# EAGLE board MainECU rev1b (EAGLE 9.2.2), part 1 of 2
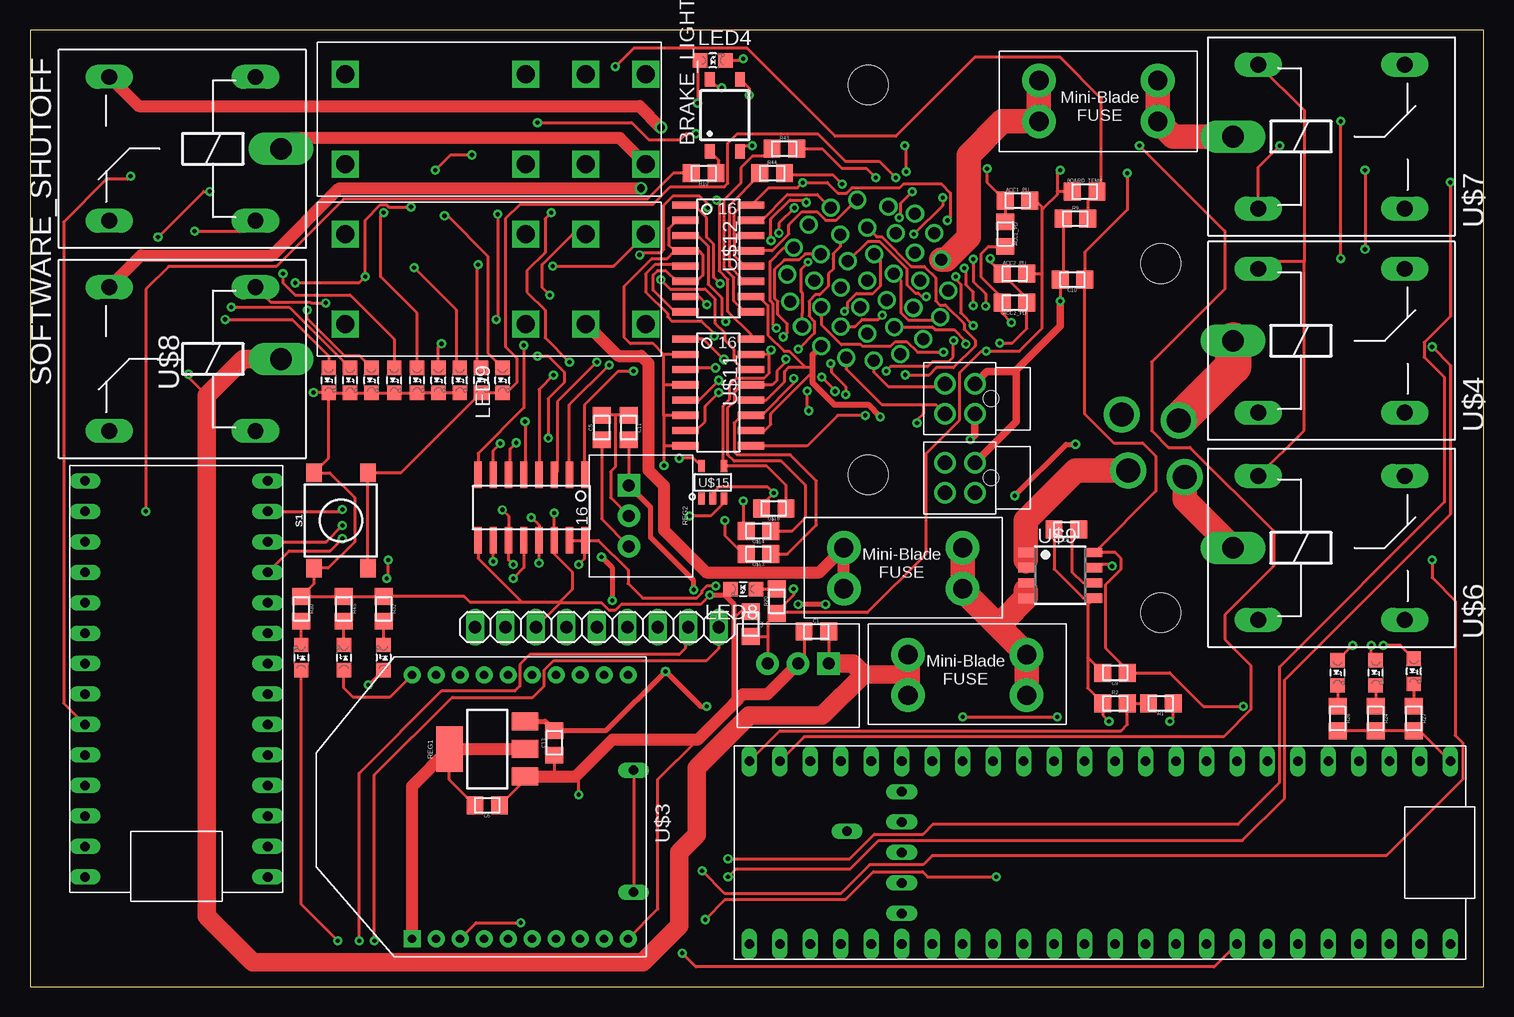
[diagram p0: board, top side]
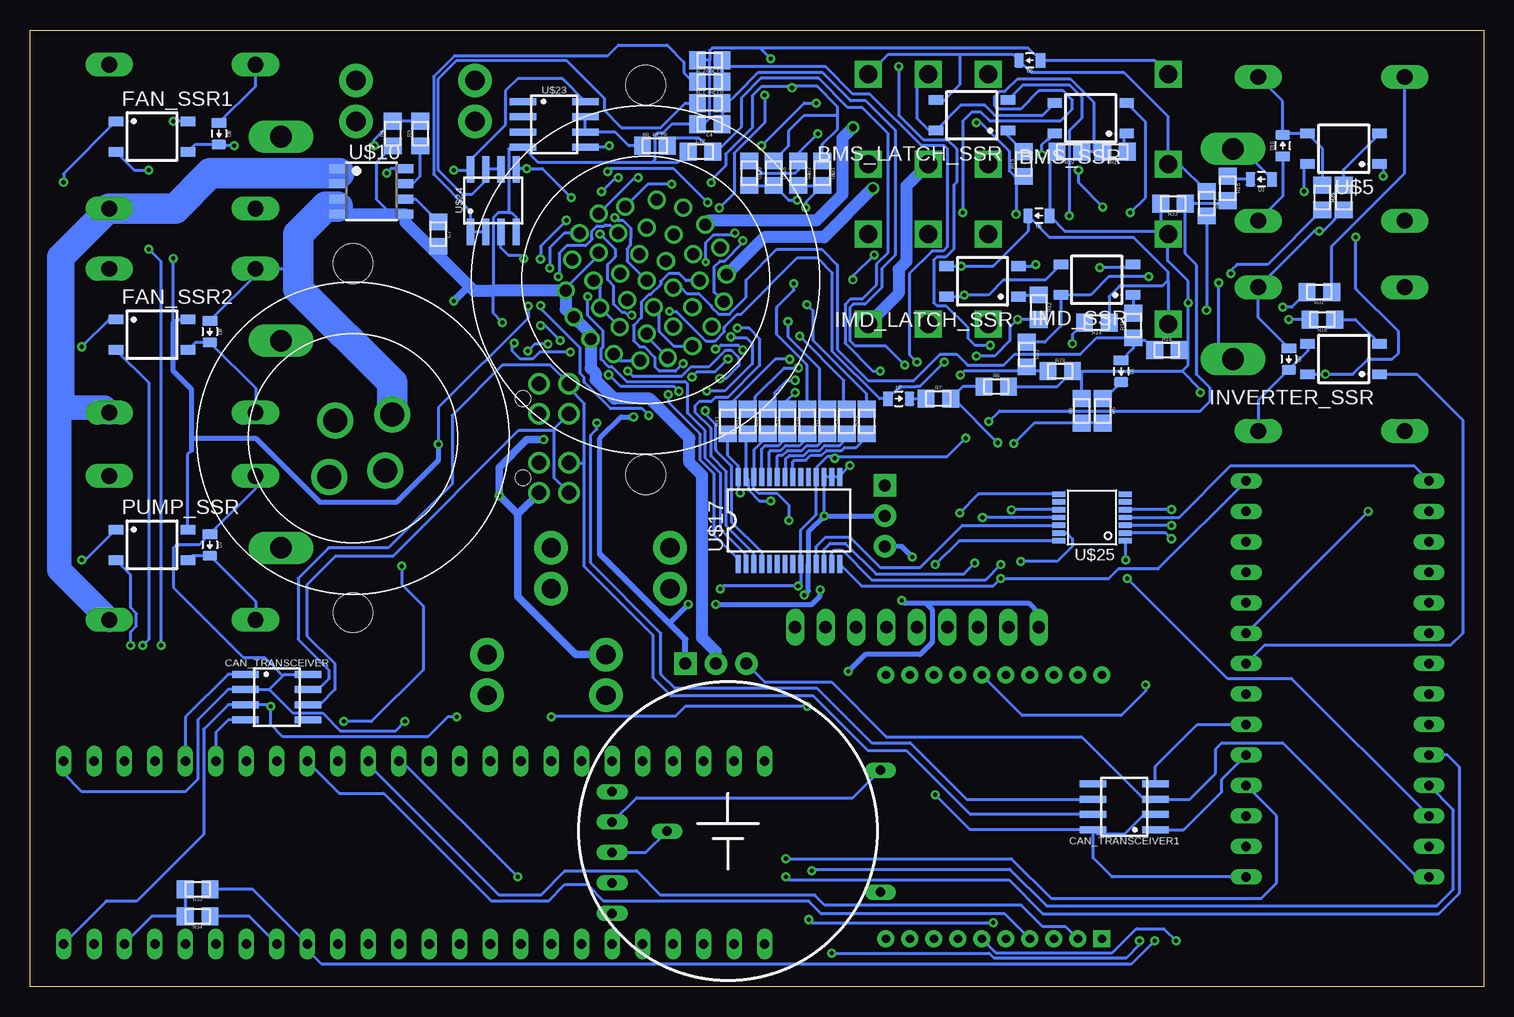
[diagram p1: board, bottom side, seen from below]

Size 121.16 x 79.76 mm. Coordinates in mm from the lower left corner, seen from the top.
Outline: 0,0 121.16,0 121.16,79.76 0,79.76 0,0
Copper layers (1*16): Top 0.035mm / dielectric 1.5mm / Bottom 0.035mm
Design rules "DRC Advanced Circuits": minimum track width 6mil, minimum drill 10mil, track to track 6mil, track to pad 6mil, pad to pad 6mil, via to via 6mil, smd to smd 6mil, copper to edge 40mil, drill to drill 6mil, minimum pad ring 10mil, minimum via ring 8mil, stop-mask expansion 4mil, vias tented up to drill 0mil, thermal gap 10mil

## Footprints (pad centres in the part's own frame; a part is rotated, then mirrored left to right if it is on the bottom)
MINI-BLADE_FUSE_HOLDER = drill 1.613 pad 2.794: L1 0,3.404; L2 0,0; R1 9.906,3.404; R2 9.906,0
0805 = smd 1.4 x 1.5: 1 -1.025,0; 2 1.025,0
1X09 = drill 1.016 long: 1 -8.89,0; 2 -6.35,0; 3 -3.81,0; 4 -1.27,0; 5 1.27,0; 6 3.81,0; 7 6.35,0; 8 8.89,0; 9 11.43,0
SOP04 = smd 0.8 x 1.2: 1 -1.27,-3; 2 1.27,-3; 3 1.27,3; 4 -1.27,3
SOIC-08 = smd 0.6 x 2.2: 1 -1.905,-2.6; 2 -0.635,-2.6; 3 0.635,-2.6; 4 1.905,-2.6; 5 1.905,2.6; 6 0.635,2.6; 7 -0.635,2.6; 8 -1.905,2.6
0805_D = smd 0.8 x 1.2: A -0.9,0; C 0.9,0
G2RL-2 = drill 1.5 square: 2 10.008,0; 3 5.004,0; 4 0,0; 5 0,7.493; 6 5.004,7.493; 7 10.008,7.493; COIL+ 25.019,0; COIL- 25.019,7.493
LED-805 = smd 1.2 x 1.2: A 0,-1.05; C 0,1.05
OKI-78SR = drill 1 pad 1.88 square: 1 -2.54,0 | drill 1 pad 1.88: 2 0,0; 3 2.54,0
SOT223 = smd 1.5 x 2.235: 1 -2.3,-3.15; 2 0,-3.15; 3 2.3,-3.15 | smd 3.8 x 2.2: 4 0,3.15
TACTILE_SWITCH_SMD_6.2MM_TALL = smd 1.55 x 1.3: A1 -3.975,-2.25; A2 3.975,-2.25; B1 -3.975,2.25; B2 3.975,2.25
ZF112 = drill 1.321 long: 1 4.064,14.884; 2 4.064,2.896; O 16.256,14.884; S 16.256,2.896 | drill 1.803 long: P 1.956,8.89
TEENSY_3.2_SIMPLE = drill 0.8 long: 3.3V 16.51,29.21; A0 16.51,3.81; A1 16.51,6.35; A2 16.51,8.89; A3 16.51,11.43; A4 16.51,13.97; A5 16.51,16.51; A6 16.51,19.05; A7 16.51,21.59; A8 16.51,24.13; A9 16.51,26.67; AGND 16.51,31.75; D0(RX1) 1.27,31.75; D1(TX1) 1.27,29.21; D2 1.27,26.67; D3(CANTX) 1.27,24.13; D4(CANRX) 1.27,21.59; D5 1.27,19.05; D6 1.27,16.51; D7(RX3) 1.27,13.97; D8(TX3) 1.27,11.43; D9(RX2) 1.27,8.89; D10(TX2) 1.27,6.35; D11 1.27,3.81; D12 1.27,1.27; D13 16.51,1.27; GND 1.27,34.29; VIN 16.51,34.29
TEENSY_3.5_EXT = drill 0.8 long: 3.3V 16.51,54.61; 3.3V_1 1.27,24.13; 3.3V_2 6.35,13.97; A0 16.51,29.21; A1 16.51,31.75; A2 16.51,34.29; A3 16.51,36.83; A4 16.51,39.37; A5 16.51,41.91; A6 16.51,44.45; A7 16.51,46.99; A8 16.51,49.53; A9 16.51,52.07; A12 1.27,3.81; A13 1.27,1.27; A14 16.51,1.27; A15 16.51,3.81; A16 16.51,6.35; A17 16.51,8.89; A18 16.51,11.43; A19 16.51,13.97; A20 16.51,16.51; A21 16.51,19.05; A22 16.51,21.59; AGND 16.51,57.15; D0(RX1) 1.27,57.15; D1(TX1) 1.27,54.61; D2 1.27,52.07; D3(CANTX) 1.27,49.53; D4(CANRX) 1.27,46.99; D5 1.27,44.45; D6 1.27,41.91; D7(RX3) 1.27,39.37; D8(TX3) 1.27,36.83; D9(RX2) 1.27,34.29; D10(TX2) 1.27,31.75; D11 1.27,29.21; D12 1.27,26.67; D13 16.51,26.67; D24 1.27,21.59; D25 1.27,19.05; D26 1.27,16.51; D27 1.27,13.97; D28 1.27,11.43; D29 1.27,8.89; D30 1.27,6.35; GND 1.27,59.69; GND_1 16.51,24.13; GND_2 8.89,13.97; PROG 11.43,13.97; RST 13.97,13.97; VBAT 3.81,13.97; VIN 16.51,59.69
XBEE = drill 0.7 pad 1.422 square: 1 -11,5.5 | drill 0.7 pad 1.422: 2 -11,3.5; 3 -11,1.5; 4 -11,-0.5; 5 -11,-2.5; 6 -11,-4.5; 7 -11,-6.5; 8 -11,-8.5; 9 -11,-10.5; 10 -11,-12.5; 11 11,-12.5; 12 11,-10.5; 13 11,-8.5; 14 11,-6.5; 15 11,-4.5; 16 11,-2.5; 17 11,-0.5; 18 11,1.5; 19 11,3.5; 20 11,5.5
SOP8 = smd 0.76 x 1.27: 1 -1.905,-2.86; 2 -0.635,-2.86; 3 0.635,-2.86; 4 1.905,-2.86; 5 1.905,2.86; 6 0.635,2.86; 7 -0.635,2.86; 8 -1.905,2.86
SOIC-16 = smd 0.6 x 2.2: 1 -4.445,-2.794; 2 -3.175,-2.794; 3 -1.905,-2.794; 4 -0.635,-2.794; 5 0.635,-2.794; 6 1.905,-2.794; 7 3.175,-2.794; 8 4.445,-2.794; 9 4.445,2.667; 10 3.175,2.667; 11 1.905,2.667; 12 0.635,2.667; 13 -0.635,2.667; 14 -1.905,2.667; 15 -3.175,2.667; 16 -4.445,2.667
SOT-23-5 = smd 1 x 0.55: 1 -1.35,0.95; 2 -1.35,0; 3 -1.35,-0.95; 4 1.35,-0.95; 5 1.35,0.95
SSOP28 = smd 0.4 x 1.5: 1 -4.225,-3.625; 2 -3.575,-3.625; 3 -2.925,-3.625; 4 -2.275,-3.625; 5 -1.625,-3.625; 6 -0.975,-3.625; 7 -0.325,-3.625; 8 0.325,-3.625; 9 0.975,-3.625; 10 1.625,-3.625; 11 2.275,-3.625; 12 2.925,-3.625; 13 3.575,-3.625; 14 4.225,-3.625; 15 4.225,3.625; 16 3.575,3.625; 17 2.925,3.625; 18 2.275,3.625; 19 1.625,3.625; 20 0.975,3.625; 21 0.325,3.625; 22 -0.325,3.625; 23 -0.975,3.625; 24 -1.625,3.625; 25 -2.275,3.625; 26 -2.925,3.625; 27 -3.575,3.625; 28 -4.225,3.625
TSSOP-14 = smd 0.45 x 1.1: 1 -1.958,-2.618; 2 -1.308,-2.618; 3 -0.657,-2.618; 4 -0.007,-2.618; 5 0.642,-2.618; 6 1.292,-2.618; 7 1.942,-2.618; 8 1.942,2.918; 9 1.292,2.918; 10 0.642,2.918; 11 -0.007,2.918; 12 -0.657,2.918; 13 -1.308,2.918; 14 -1.958,2.918
CR-2450/G1AN = drill 0.8 long: +_0 -5.08,12.7; +_1 5.08,12.7; - 0,-5.08
AUTOSPORT_14-35 = drill 1: P$1 1.143,6.655; P$2 3.124,5.512; P$3 5.359,4.064; P$4 6.452,2.032; P$5 6.756,-0.254; P$6 6.274,-2.489; P$7 5.08,-4.445; P$8 3.302,-5.893; P$9 1.143,-6.655; P$10 -1.143,-6.655; P$11 -3.302,-5.893; P$12 -5.08,-4.445; P$13 -6.274,-2.489; P$14 -6.756,-0.254; P$15 -6.452,2.032; P$16 -5.359,4.064; P$17 -3.124,5.512; P$18 -1.143,6.655; P$19 1.143,4.369; P$20 3.124,3.023; P$21 4.318,1.016; P$22 4.318,-1.27; P$23 3.124,-3.226; P$24 1.143,-4.369; P$25 -1.143,-4.369; P$26 -3.124,-3.226; P$27 -4.318,-1.27; P$28 -4.318,1.016; P$29 -3.124,3.023; P$30 -1.143,4.369; P$31 1.143,1.88; P$32 2.286,-0.102; P$33 1.143,-2.083; P$34 -1.143,-2.083; P$35 -2.286,-0.102; P$36 -1.143,1.88; P$37 0,-0.102 | hole 3.3: -11.491,-11.491; 11.491,11.491
AUTOSPORT_12-04 = drill 2: P$1 0,3.81; P$2 3.708,0.889; P$3 0,-2.108; P$4 -3.708,0.889 | hole 3.3: -10.288,-10.288; 10.288,10.288
NANO-FIT_VERTICAL-4 = drill 1.2: P$1 -1.25,0; P$2 1.25,0; P$3 -1.25,2.5; P$4 1.25,2.5 | hole 1.3: 0,-1.34

## Placement (x,y rotation side)
5ABOARDFUSE  [MINI-BLADE_FUSE_HOLDER]  83.06,27.69 180 top
5AFUSE  [MINI-BLADE_FUSE_HOLDER]  84.07,72.14 0 top
5ASHUTDOWNFUSE  [MINI-BLADE_FUSE_HOLDER]  77.72,36.58 180 top
AC1_FILTR  510  [0805]  64.52,73.66 0 bottom
AC2_FILTR  510  [0805]  64.52,75.44 0 bottom
ACC1_PD  10k  [0805]  81.28,62.74 270 top
ACC1_PU  10k  [0805]  82.3,65.53 0 top
ACC2_PD  10k  [0805]  82.04,57.02 180 top
ACC2_PU  10k  [0805]  82.04,59.44 0 top
ADXL345_BREAKOUT  [1X09]  45.97,29.97 0 top
BMS_LATCH_SSR  CPC1002N  [SOP04]  42.67,72.64 90 bottom
BMS_SSR  CPC1002N  [SOP04]  32.77,72.39 90 bottom
BOARD_TEMP  THERMISTOR_NCP210805  [0805]  87.88,66.29 0 top
BR_FILTR  100  [0805]  69.09,70.1 0 bottom
BRAKE_LIGHT_SSR  CPC1002N  [SOP04]  57.91,72.64 0 top
C1  .22uF  [0805]  65.53,29.59 0 top
C2  .1uF  [0805]  60.07,30.23 270 top
C3  22µ  [0805]  64.52,77.22 180 bottom
C4  22µ  [0805]  64.52,71.88 180 bottom
C5  1uF  [0805]  47.62,46.61 90 top
C6  1uF  [0805]  38.1,15.11 180 top
C7  [0805]  87.12,62.74 270 bottom
C8  [0805]  86.36,38.1 180 top
C9  [0805]  90.42,26.16 180 top
C10  [0805]  86.87,58.93 180 top
C11  .22uF  [0805]  49.91,46.61 270 top
C12  2.2µ  [0805]  65.28,69.6 0 bottom
C13  .1uF  [0805]  43.69,20.32 90 top
CAN_TRANSCEIVER  MCP2551  [SOIC-08]  100.58,24.13 270 bottom
CAN_TRANSCEIVER1  MCP2551  [SOIC-08]  29.97,14.99 90 bottom
D1  DIODE0805  [0805_D]  30.23,51.31 270 bottom
D2  DIODE0805  [0805_D]  48.77,49.02 0 bottom
D3  DIODE0805  [0805_D]  18.54,67.31 180 bottom
D4  DIODE0805  [0805_D]  16.26,52.32 270 bottom
D5  DIODE0805  [0805_D]  37.85,77.22 180 bottom
D6  DIODE0805  [0805_D]  37.08,64.26 180 bottom
D7  DIODE0805  [0805_D]  106.17,36.83 270 bottom
D8  DIODE0805  [0805_D]  105.41,71.12 270 bottom
D9  DIODE0805  [0805_D]  106.17,54.61 270 bottom
D10  DIODE0805  [0805_D]  16.76,70.1 90 bottom
FAN_SSR1  CPC1002N  [SOP04]  111,70.87 270 bottom
FAN_SSR2  CPC1002N  [SOP04]  111,54.36 270 bottom
IMD_LATCH_SSR  CPC1002N  [SOP04]  41.78,58.8 90 bottom
IMD_SHUTDOWN  G2RL-2-DC12  [G2RL-2]  51.31,62.74 180 top
IMD_SHUTDOWN1  G2RL-2-DC12  [G2RL-2]  51.31,76.07 180 top
IMD_SSR  CPC1002N  [SOP04]  32.26,58.93 90 bottom
INVERTER_SSR  CPC1002N  [SOP04]  11.68,52.32 90 bottom
LED1  White  [LED-805]  37.59,50.55 180 top
LED2  White  [LED-805]  39.37,50.55 180 top
LED3  Green  [LED-805]  32.26,50.55 180 top
LED4  Red  [LED-805]  56.9,77.22 270 top
LED5  Yellow  [LED-805]  34.04,50.55 180 top
LED6  Red  [LED-805]  24.89,50.55 180 top
LED7  Green  [LED-805]  28.45,50.55 180 top
LED8  Purple  [LED-805]  59.44,33.15 90 top
LED9  Yellow  [LED-805]  35.81,50.55 180 top
LED10  Red  [LED-805]  29.46,27.43 0 top
LED11  Green  [LED-805]  22.61,27.43 0 top
LED12  Red  [LED-805]  115.32,26.29 180 top
LED13  Red  [LED-805]  108.97,26.16 180 top
LED14  Blue  [LED-805]  26.16,27.43 0 top
LED16  Red  [LED-805]  112.14,26.16 180 top
LED17  RED  [LED-805]  30.35,50.55 180 top
LED18  RED  [LED-805]  26.67,50.55 180 top
PUMP_SSR  CPC1002N  [SOP04]  111,36.83 270 bottom
R1  1K  [0805]  94.23,23.62 180 top
R2  2K  [0805]  90.42,23.62 0 top
R3  1K  [0805]  88.65,71.12 90 bottom
R4  2K  [0805]  90.93,71.12 90 bottom
R5  43k  [0805]  31.75,48.01 270 bottom
R6  12k  [0805]  33.53,48.01 90 bottom
R7  43k  [0805]  45.47,49.02 0 bottom
R8  12k  [0805]  40.64,50.04 0 bottom
R9  10k  [0805]  87.12,64.01 0 top
R10  43  [0805]  56.13,67.82 180 top
R11  43  [0805]  30.73,69.6 180 bottom
R12  33  [0805]  37.08,56.64 270 bottom
R13  33  [0805]  38.35,68.58 90 bottom
R14  820  [0805]  32.26,55.37 180 bottom
R15  43k  [0805]  21.34,66.55 270 bottom
R16  43  [0805]  13.46,55.63 180 bottom
R17  820  [0805]  23.11,65.28 270 bottom
R18  2.2k  [0805]  26.42,53.09 0 bottom
R19  10k  [0805]  34.54,69.6 180 bottom
R20  270  [0805]  62.23,32.13 90 top
R21  820  [0805]  29.21,55.12 90 bottom
R22  12k  [0805]  25.91,65.28 180 bottom
R23  43k  [0805]  38.1,52.7 270 bottom
R24  33  [0805]  112.14,22.35 270 top
R25  330  [0805]  11.68,65.79 90 bottom
R26  1.2K  [0805]  13.46,65.79 270 bottom
R27  33  [0805]  115.32,22.35 270 top
R28  33  [0805]  108.97,22.35 270 top
R29  12k  [0805]  35.31,51.31 0 bottom
R30  33  [0805]  22.61,31.5 270 top
R31  1.2K  [0805]  13.72,57.91 180 bottom
R32  100  [0805]  29.46,31.5 270 top
R33  4.7k  [0805]  107.19,8.13 180 bottom
R34  4.7k  [0805]  107.19,5.84 180 bottom
R35  270  [0805]  51.44,47.12 90 bottom
R36  270  [0805]  53.09,47.12 90 bottom
R37  270  [0805]  54.74,47.12 90 bottom
R38  270  [0805]  56.39,47.12 90 bottom
R39  270  [0805]  58.04,47.12 90 bottom
R40  270  [0805]  59.69,47.12 90 bottom
R41  270  [0805]  61.34,47.12 90 bottom
R42  270  [0805]  62.99,47.12 90 bottom
R43  0  [0805]  62.87,69.85 0 top
R44  0  [0805]  61.85,67.82 0 top
R45  2.3k  [0805]  26.16,31.5 270 top
REG  5V  [OKI-78SR]  64.01,26.92 180 top
REG1  TLV1117LV33  [SOT223]  38.1,19.81 90 top
REG2  5V  [OKI-78SR]  49.91,39.24 270 top
S1  [TACTILE_SWITCH_SMD_6.2MM_TALL]  25.91,38.86 90 top
SOFTWARE_SHUTOFF  G5LE  [ZF112]  22.86,78.74 180 top
U$1  TEENSY_3.2_SIMPLE  [TEENSY_3.2_SIMPLE]  21.08,43.43 180 top
U$2  TEENSY_3.5_EXT  [TEENSY_3.5_EXT]  58.67,20.07 270 top
U$3  XBEE  [XBEE]  37.34,14.99 90 top
U$4  G5LE  [ZF112]  98.3,44.96 0 top
U$5  CPC1002N  [SOP04]  11.68,69.85 90 bottom
U$6  G5LE  [ZF112]  98.3,27.69 0 top
U$7  G5LE  [ZF112]  98.3,61.98 0 top
U$8  G5LE  [ZF112]  22.86,61.21 180 top
U$9  ACS715_CURRENT_SENSOR  [SOP8]  85.85,34.29 270 top
U$10  ACS715_CURRENT_SENSOR  [SOP8]  92.71,66.29 270 bottom
U$11  TLP291-4  [SOIC-16]  57.43,49.53 270 top
U$12  TLP291-4  [SOIC-16]  57.43,60.71 270 top
U$13  JUMPER  [0805]  60.71,36.07 180 top
U$14  JUMPER  [0805]  60.71,37.97 180 top
U$15  SN74LV1T34  [SOT-23-5]  56.9,42.04 90 top
U$16  JUMPER  [0805]  59.18,67.82 270 bottom
U$17  MCP23S17SSOP28  [SSOP28]  57.91,38.86 0 bottom
U$18  MCP3208SOIC  [SOIC-16]  41.78,39.88 180 top
U$19  JUMPER  [0805]  61.98,39.88 180 top
U$20  JUMPER  [0805]  61.21,67.82 270 bottom
U$21  JUMPER  [0805]  55.12,67.82 270 bottom
U$22  JUMPER  [0805]  57.15,67.82 270 bottom
U$23  MCP6002SOIC  [SOIC-08]  77.47,71.88 270 bottom
U$24  MCP6002SOIC  [SOIC-08]  82.55,65.53 0 bottom
U$25  TXB0104TSSOP  [TSSOP-14]  32.51,39.12 90 bottom
U$26  CR-2450/G1AN  [CR-2450/G1AN]  62.99,12.95 270 bottom
X1  CONNECTOR-37  [AUTOSPORT_14-35]  69.85,58.93 45 bottom
X2  CONNECTOR-4AUTOSPORT  [AUTOSPORT_12-04]  94.23,45.72 225 bottom
X3  CONNECTOR-4NANO-FIT-VERTICAL-4  [NANO-FIT_VERTICAL-4]  78.74,49.02 90 top
X4  CONNECTOR-4NANO-FIT-VERTICAL-4  [NANO-FIT_VERTICAL-4]  78.74,42.42 90 top

## Library data of the parts
5ABOARDFUSE 5AFUSE 5ASHUTDOWNFUSE AC1_FILTR AC2_FILTR ACC1_PD ACC1_PU ACC2_PD ACC2_PU ADXL345_BREAKOUT BMS_LATCH_SSR BMS_SSR BOARD_TEMP BR_FILTR BRAKE_LIGHT_SSR C1-C13 CAN_TRANSCEIVER CAN_TRANSCEIVER1 D1-D10 FAN_SSR1 FAN_SSR2 IMD_LATCH_SSR IMD_SHUTDOWN IMD_SHUTDOWN1 IMD_SSR INVERTER_SSR LED1-LED14 LED16-LED18 PUMP_SSR R1-R45 REG REG1 REG2 S1 SOFTWARE_SHUTOFF U$1-U$26 X1-X4 = HyTechDevices

## Nets
3.3V: R33.2 R34.2 U$2.3.3V
3.3V_MAIN_TEENSY: U$1.3.3V U$25.1
12VIN: U$9.1 U$9.2 X2.P$1
12VSUPPLY_READ: R23.2 R29.1 U$18.4
12VUNFUSED: 5ABOARDFUSE.L1 5ABOARDFUSE.L2 5ASHUTDOWNFUSE.L1 5ASHUTDOWNFUSE.L2 U$9.3 U$9.4
+5V: ACC1_PU.2 ACC2_PU.2 BOARD_TEMP.1 C2.2 CAN_TRANSCEIVER1.3 R12.2 R13.1 R20.1 REG.3 U$1.VIN U$15.5 U$17.9 U$17.18 U$18.15 U$18.16 U$20.1 U$22.1 U$23.8 U$24.8 U$25.14 X1.P$27 X1.P$28 X1.P$29
+12V: 5ABOARDFUSE.R1 5ABOARDFUSE.R2 BMS_SSR.4 BRAKE_LIGHT_SSR.4 C1.2 C11.2 FAN_SSR1.4 FAN_SSR2.4 IMD_SSR.4 INVERTER_SSR.4 PUMP_SSR.4 R23.1 REG2.1 REG.1 U$5.4 U$8.P U$11.10 U$11.12 U$12.10 U$12.12 U$12.14 U$12.16 U$16.1 U$21.1 X1.P$10 X1.P$34 X3.P$1 X4.P$1
BMS_COIL_PWR: BMS_LATCH_SSR.3 D5.C IMD_SHUTDOWN1.4 IMD_SHUTDOWN1.COIL- R17.1
BMS_OK: D2.A R11.2 R19.1 X1.P$31
BMS_OK_READ: R7.2 R8.1 U$18.6
BMS_PWR_STEP: BMS_LATCH_SSR.4 BMS_SSR.3 IMD_SHUTDOWN1.3
BRAKE_LIGHT: BRAKE_LIGHT_SSR.3 X1.P$9
BRAKE_LIGHT_CTRL: R10.2 U$1.D7(RX3)
CANH: CAN_TRANSCEIVER1.7 CAN_TRANSCEIVER.7 X1.P$12 X1.P$13 X3.P$4 X4.P$4
CANL: CAN_TRANSCEIVER1.6 CAN_TRANSCEIVER.6 X1.P$11 X1.P$26 X3.P$3 X4.P$3
COOLINGSENSE: R3.2 R4.2 U$2.A12
CS1_5V: U$18.10 U$25.13
CS1_TEENSY: U$1.D9(RX2) U$25.2
CS2_5V: U$17.11 U$25.12
CS2_TEENSY: U$1.D10(TX2) U$25.3
CURRENTSENSE2: U$4.S U$6.S U$7.S U$10.1 U$10.2
DASH_CTRL1: R35.1 U$17.21
DASH_CTRL2: R36.1 U$17.22
DASH_CTRL3: R37.1 U$17.23
DASH_CTRL4: R38.1 U$17.24
DASH_CTRL5: R39.1 U$17.25
DASH_CTRL6: R40.1 U$13.2 U$17.26
DASH_CTRL7: R41.1 U$14.2 U$17.27
DASH_CTRL8: R42.1 U$15.2 U$17.28 U$19.2
DASH_CTRL9: U$17.1 X1.P$23
DASH_CTRL10: U$17.2 X1.P$32
DASH_CTRL11: U$17.3 X1.P$6
DASH_CTRL12: U$17.4 X1.P$22
DASH_IO1: R43.2 X1.P$1
DASH_IO2: R44.2 X1.P$2
DASH_IO3: U$12.13 X1.P$3
DASH_IO4: U$12.15 X1.P$4
DASH_IO5: U$11.9 X1.P$18
DASH_IO6: U$11.11 U$13.1 X1.P$19
DASH_IO7: U$11.13 U$14.1 X1.P$20
DASH_IO8: U$11.15 U$15.4 U$19.1 X1.P$21
ECUSENSE: R1.2 R2.2 U$2.A13
FAN1-: 5AFUSE.R1 5AFUSE.R2 U$7.P
FAN2-: U$4.P X2.P$3
GND: ACC1_PD.2 ACC2_PD.2 ADXL345_BREAKOUT.3 C1.1 C2.1 C3.2 C4.2 C5.2 C6.1 C7.2 C8.2 C9.2 C10.2 C11.1 C12.1 C13.1 CAN_TRANSCEIVER1.2 CAN_TRANSCEIVER1.8 CAN_TRANSCEIVER.2 CAN_TRANSCEIVER.8 D4.A D5.A D6.A D7.A D8.A D9.A D10.A IMD_SHUTDOWN1.COIL+ IMD_SHUTDOWN.COIL+ LED3.C LED4.C LED5.C LED6.C LED7.C LED8.C LED9.C LED17.C LED18.C R2.1 R4.1 R6.2 R8.2 R9.1 R18.2 R19.2 R22.2 R24.2 R25.1 R27.2 R28.2 R29.2 R30.1 R32.1 R45.1 REG1.1 REG2.2 REG.2 S1.B1 S1.B2 SOFTWARE_SHUTOFF.1 U$1.GND U$2.GND U$3.10 U$4.1 U$6.1 U$7.1 U$8.2 U$9.5 U$10.3 U$10.4 U$10.5 U$11.2 U$11.4 U$11.6 U$11.8 U$12.2 U$12.4 U$12.6 U$12.8 U$15.3 U$17.10 U$17.15 U$17.16 U$17.17 U$18.9 U$18.14 U$23.4 U$24.4 U$25.8 X1.P$14 X1.P$15 X1.P$16 X1.P$30 X1.P$36 X2.P$4 X3.P$2 X4.P$2
IMD_COIL_PWR: D6.C IMD_LATCH_SSR.3 IMD_SHUTDOWN.4 IMD_SHUTDOWN.COIL- R14.1
IMD_PWR_STEP: IMD_LATCH_SSR.4 IMD_SHUTDOWN.3 IMD_SSR.3
INVERTER_CTRL: INVERTER_SSR.1 U$1.D6
INVERTER_SUPPLY: U$8.S X1.P$7
LATCH_EXT_BUTTON: LED1.C LED2.C S1.A1 S1.A2 X1.P$37
MISO_TEENSY: U$1.D12 U$17.14 U$18.12
MOSI_5V: U$17.13 U$18.11 U$25.10
MOSI_TEENSY: U$1.D11 U$25.5
N$1: 5AFUSE.L1 5AFUSE.L2 X1.P$17
N$2: IMD_LATCH_SSR.2 LED1.A
N$3: R1.1 U$9.7
N$4: D7.C PUMP_SSR.3 U$6.2
N$5: IMD_LATCH_SSR.1 R12.1
N$6: R3.1 U$10.7
N$7: BRAKE_LIGHT_SSR.2 LED4.A
N$8: C8.1 U$9.6
N$9: BMS_SSR.2 LED3.A
N$10: D1.C R5.1
N$11: D2.C R7.1
N$12: BMS_LATCH_SSR.1 R13.2
N$13: CAN_TRANSCEIVER.4 U$2.D4(CANRX)
N$14: CAN_TRANSCEIVER.1 U$2.D3(CANTX)
N$15: CAN_TRANSCEIVER1.4 U$1.D4(CANRX)
N$16: BMS_LATCH_SSR.2 LED2.A
N$17: BRAKE_LIGHT_SSR.1 R10.1
N$18: BMS_SSR.1 R11.1
N$19: LED5.A R14.2
N$20: D8.C FAN_SSR1.3 U$7.2
N$21: D9.C FAN_SSR2.3 U$4.2
N$22: CAN_TRANSCEIVER1.1 U$1.D3(CANTX)
N$23: AC2_FILTR.1 U$24.1 U$24.2
N$24: AC1_FILTR.1 U$24.6 U$24.7
N$25: BR_FILTR.1 U$23.6 U$23.7
N$26: D4.C INVERTER_SSR.3 U$8.1
N$27: INVERTER_SSR.2 R16.1
N$28: LED6.A R16.2
N$29: LED8.A R20.2
N$30: LED16.C R24.1
N$31: IMD_SSR.1 R21.2
N$32: LED7.A R17.2
N$33: D3.C R15.1
N$34: IMD_SSR.2 LED9.A
N$35: LED14.C R45.2
N$36: LED13.C R28.1
N$37: LED12.C R27.1
N$38: LED12.A PUMP_SSR.2
N$39: FAN_SSR2.2 LED16.A
N$40: LED18.A R31.2
N$41: U$2.3.3V_2 U$26.+_0 U$26.+_1
N$42: FAN_SSR1.2 LED13.A
N$43: D10.C R26.1 SOFTWARE_SHUTOFF.2 U$5.3
N$44: R25.2 U$5.2
N$45: LED11.C R30.2
N$46: LED17.A R26.2
N$47: LED11.A U$3.6
N$48: C7.1 U$10.6
N$49: LED10.A U$3.15
N$50: LED10.C R32.2
N$51: R35.2 U$12.7
N$52: R36.2 U$12.5
N$53: R37.2 U$12.3
N$54: R38.2 U$12.1
N$55: R39.2 U$11.7
N$56: R40.2 U$11.5
N$57: R41.2 U$11.3
N$58: R42.2 U$11.1
N$59: R43.1 U$12.9
N$60: R44.1 U$12.11
N$61: U$11.16 U$16.2 U$20.2
N$62: U$11.14 U$21.2 U$22.2
N$63: LED14.A U$3.20
N$64: U$2.GND_2 U$26.-
N$65: U$25.7
OKHS: D1.A R18.1 R21.1 X1.P$33
OKHS_READ: R5.2 R6.1 U$18.7
PUMP1-: U$6.P X2.P$2
READ_ACCEL1: AC1_FILTR.2 C4.1 U$18.2
READ_ACCEL2: AC2_FILTR.2 C3.1 U$18.3
READ_BRAKE: BR_FILTR.2 C12.2 U$18.1
RELAY_CTRL1: PUMP_SSR.1 U$1.A9
RELAY_CTRL2: FAN_SSR1.1 U$1.D2
RELAY_CTRL3: FAN_SSR2.1 U$1.A8
SCK_5V: U$17.12 U$18.13 U$25.11
SCK_TEENSY: U$1.D13 U$25.4
SCL: ADXL345_BREAKOUT.9 R34.1 U$2.A5
SDA: ADXL345_BREAKOUT.8 R33.1 U$2.A4
SHUTDOWN_A: 5ASHUTDOWNFUSE.R1 5ASHUTDOWNFUSE.R2 IMD_SHUTDOWN.6
SHUTDOWN_B: IMD_SHUTDOWN1.6 IMD_SHUTDOWN.5
SHUTDOWN_C: D3.A IMD_SHUTDOWN1.5 SOFTWARE_SHUTOFF.P
SHUTDOWN_D: R31.1 SOFTWARE_SHUTOFF.S X1.P$5
SHUTDOWN_OUT_READ: R15.2 R22.1 U$18.5
SIGNAL_ACCEL1: ACC1_PD.1 ACC1_PU.1 U$24.5 X1.P$25
SIGNAL_ACCEL2: ACC2_PD.1 ACC2_PU.1 U$24.3 X1.P$24
SIGNAL_BRAKE: U$23.5 X1.P$8
SOFTWARE_SHUTDOWN: U$1.A7 U$5.1
TELEMETRY5V: ADXL345_BREAKOUT.1 C5.1 C9.1 C10.1 C13.2 CAN_TRANSCEIVER.3 REG1.3 REG2.3 U$2.VIN U$9.8 U$10.8
TEMPSENSE: BOARD_TEMP.2 R9.2 U$18.8
VCC: C6.2 REG1.2 REG1.4 U$3.1
XB8: U$2.D7(RX3) U$3.4
XBDI: U$2.D10(TX2) U$3.3
XBDO: U$2.D9(RX2) U$3.2